# Altium PCB PCB1.PcbDoc
Units mil, origin at the board's own origin, x right, y up, seen from the top; angles counter-clockwise.
Board outline 3936.02 x 2558.06 mil, 2 copper layers (Top Layer, Bottom Layer), stack 61.855 mil thick; 16 components, 2 nets, 52 pads, 0 vias.
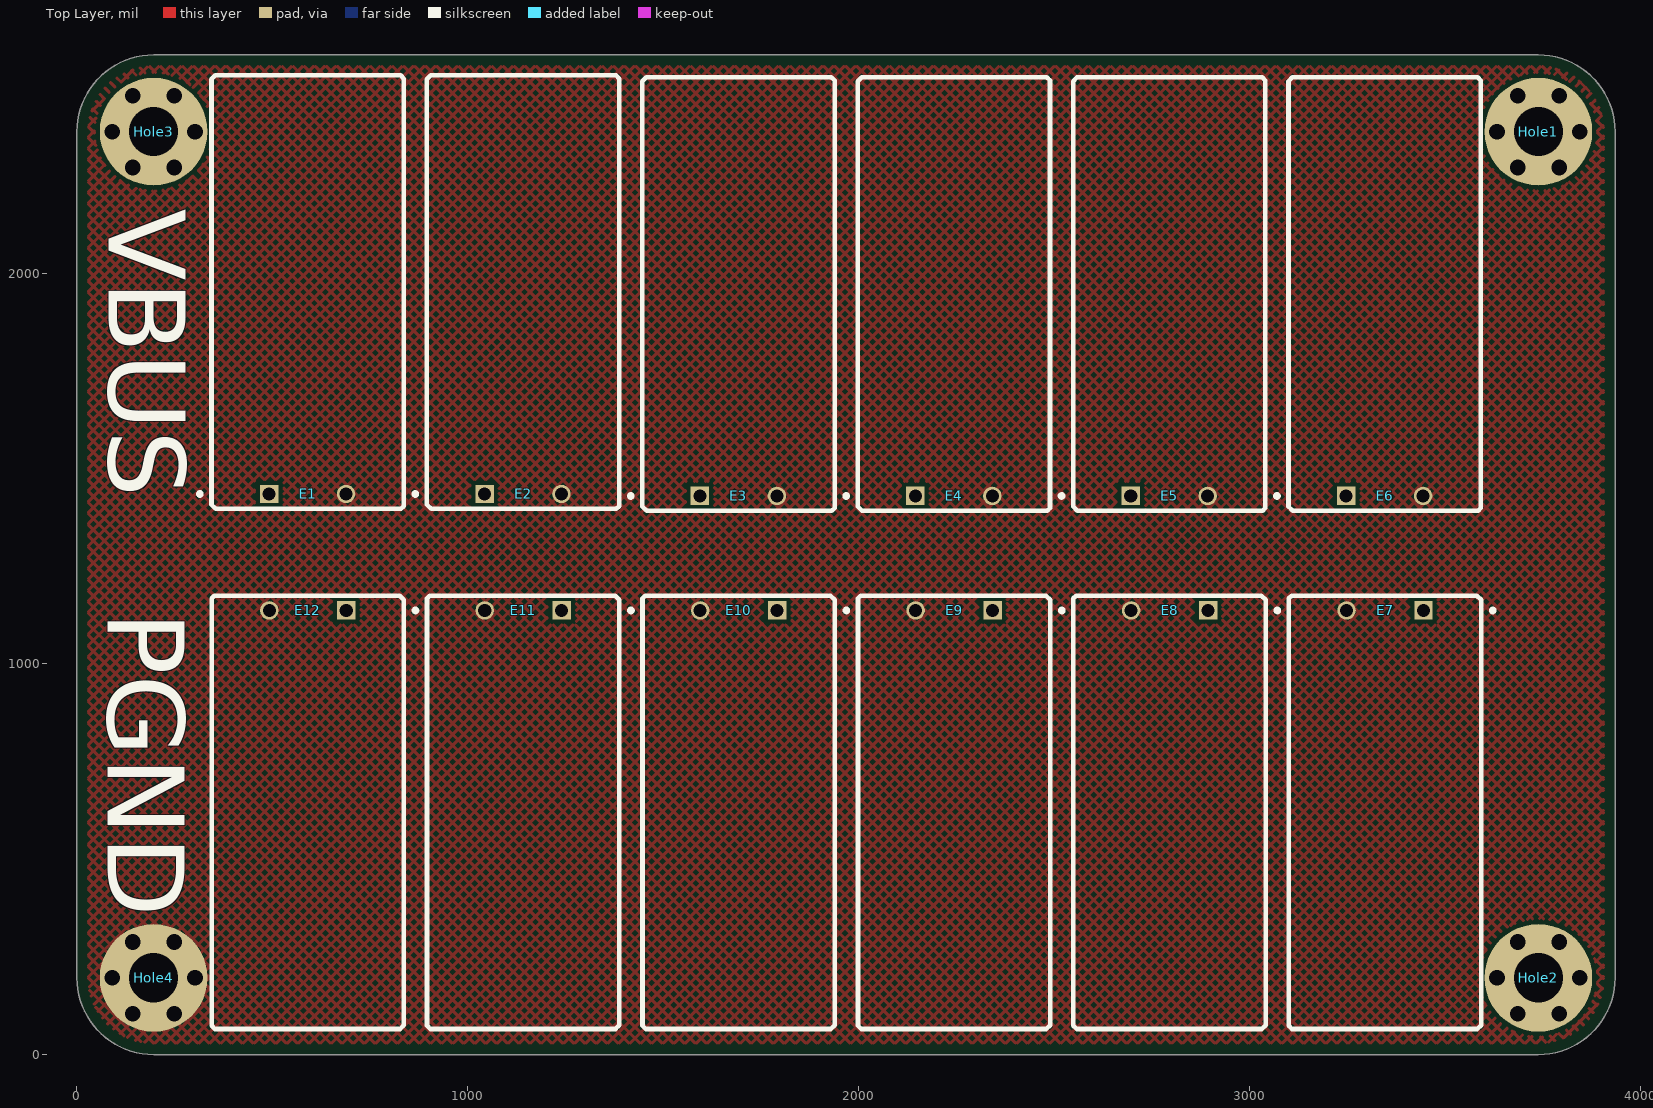
[diagram p0: Top Layer view]
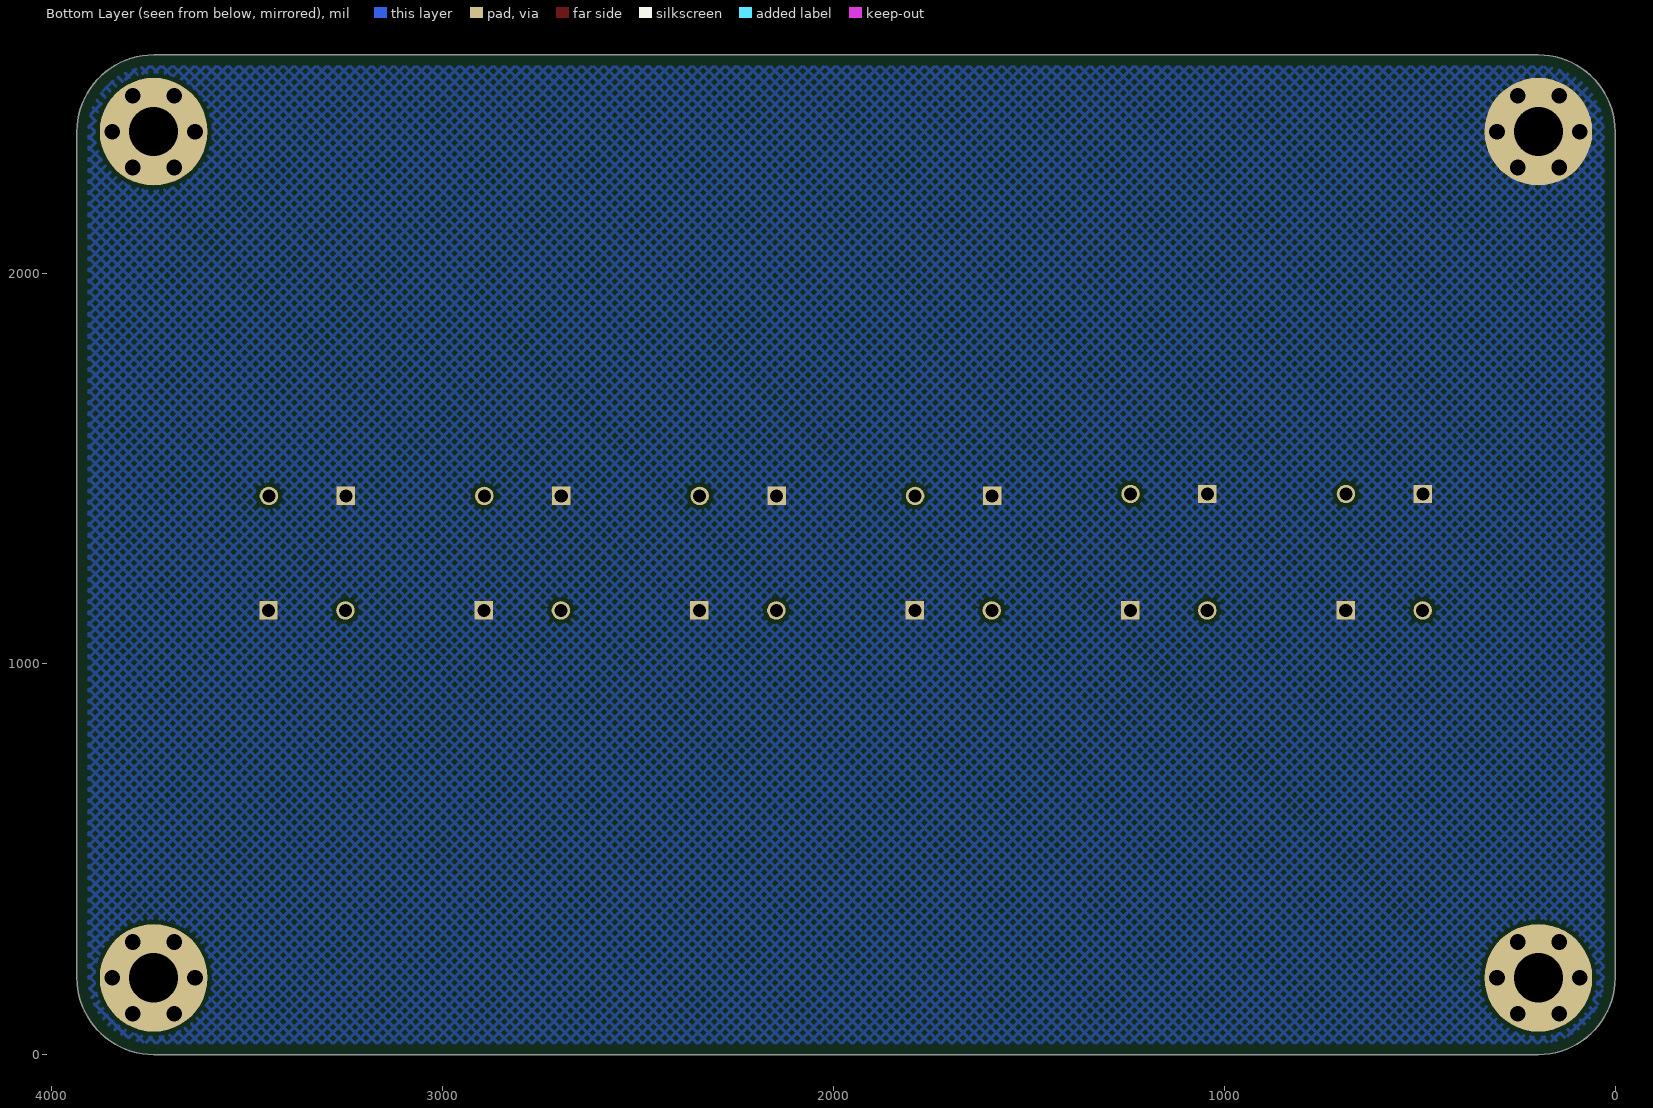
[diagram p1: Bottom Layer view, seen from below]

## Layer stack, top to bottom
Top Solder: solder mask 0.4, Solder Resist, Dk 3.5
Top Layer: signal copper 1.4
Dielectric 1: dielectric 59.0551, FR-4, Dk 4.8
Bottom Layer: signal copper 1.4
Bottom Solder: solder mask 0.4, Solder Resist, Dk 3.5

## Board outline
0.25,196.85 0.25,2362.21 cw(c196.6,2362.21) 196.6,2558.56 3739.91,2558.56 cw(c3739.91,2362.21) 3936.27,2362.21 3936.27,196.85 cw(c3739.91,196.85) 3739.91,0.5 196.6,0.5 cw(c196.6,196.85)

## Design rules (kind name [scope] priority, off if disabled: settings)
BoardOutlineClearance [All] p1: gap=25 ignorepadtopadclearanceinfootprint=FALSE
Clearance [All] p1: gap=10 ignorepadtopadclearanceinfootprint=FALSE except(0: Arc-Hole Track-Hole SMDPad-Hole THPad-Hole Via-Hole Fill-Hole Poly-Hole Region-Hole Text-Hole)
PolygonConnect [All] p1: connectstyle=Direct reliefconductorwidth=10 reliefentries=4 polygonreliefangle="90 Angle" airgapwidth=10
RoutingVias [All] p1: holewidth=28 width=50 viastyle="Through Hole" minholewidth=28 minwidth=50 maxholewidth=28 maxwidth=50
SolderMaskExpansion [All] p1: expansion=4 istentingtop=FALSE
Width [All] p1: maxlimit=10 minlimit=10 preferedwidth=10
30 further rules are at their usual default settings.

## Components (designator, comment, footprint, x,y, rotation, side; value= is the part's Value field where it differs from the comment)
E1 "330uF 100V" "13*25插件电解电容 卧式" 590.57,1435 r0 top
E2 "330uF 100V" "13*25插件电解电容 卧式" 1141.77,1435 r0 top
E3 "330uF 100V" "13*25插件电解电容 卧式" 1692.97,1430 r0 top
E4 "330uF 100V" "13*25插件电解电容 卧式" 2244.17,1430 r0 top
E5 "330uF 100V" "13*25插件电解电容 卧式" 2795.37,1430 r0 top
E6 "330uF 100V" "13*25插件电解电容 卧式" 3346.57,1430 r0 top
E7 "330uF 100V" "13*25插件电解电容 卧式" 3347.57,1137 r180 top
E8 "330uF 100V" "13*25插件电解电容 卧式" 2796.26,1137 r180 top
E9 "330uF 100V" "13*25插件电解电容 卧式" 2244.94,1137 r180 top
E10 "330uF 100V" "13*25插件电解电容 卧式" 1693.63,1137 r180 top
E11 "330uF 100V" "13*25插件电解电容 卧式" 1142.31,1137 r180 top
E12 "330uF 100V" "13*25插件电解电容 卧式" 591,1137 r180 top
Hole1 "M3螺纹孔" M3_3*7载流孔_螺丝 3739.91,2362.21 r0 top
Hole2 "M3螺纹孔" M3_3*7载流孔_螺丝 3739.91,196.85 r0 top
Hole3 "M3螺纹孔" M3_3*7载流孔_螺丝 196.6,2362.21 r0 top
Hole4 "M3螺纹孔" M3_3*7载流孔_螺丝 196.6,196.85 r0 top

## Footprints (in the part's own frame and the unit in brackets; to place one, negate y for a bottom-side part, rotate by r counter-clockwise, add the part's x,y. Pads: shape width x height; smd on the part's side, far side on the other; paste and mask are expansions set on the pad)
"13*25插件电解电容 卧式" [mm]
  rect 1.2x1.2 hole 0.85: 1(-2.5,0)
  round 1.2 hole 0.85: 2(2.5,0)
  silkscreen extent -7.1,-0.97 6.25,27.2, body extent -6.25,-0.29 6.25,27.21, height 12.45
M3_3*7载流孔_螺丝 [mil] "双面焊盘增加接触面积"
  round 40 hole 40: 1(-106,0) 1(-53,-91.8) 1(-53,91.8) 1(53,-91.8) 1(53,91.8) 1(106,0)
  round 275.59 hole 125.98: 1(0,0)
  body extent -137,-138 137,138, height 150

## Part data
E1 E2 E3 E4 E5 E6 E7 E8 E9 E10 E11 E12: library part C-CD, "贴片钽电容", BOM名称=贴片钽电容, 学习资源=www.ooocke.com, 版权归属=源创客

## Nets (pads, with @x,y where several pads share a name; then routed paths per layer and width w, separated by ;. In a path a pad name is that pad's centre, name@x,y a point inside that pad or via, vN(x,y) a via of type N, cw(c..) or ccw(c..) an arc to the next point about the centre after c; other vN are vias at no path point)
PGND: E1.2 E2.2 E3.2 E4.2 E5.2 E6.2 E7.2 E8.2 E9.2 E10.2 E11.2 E12.2 Hole4.1
VBUS: E1.1 E2.1 E3.1 E4.1 E5.1 E6.1 E7.1 E8.1 E9.1 E10.1 E11.1 E12.1 Hole3.1
pads on no net: Hole1.1 Hole2.1

## Polygon pours and split planes (outlines as drawn)
VBUS on Bottom Layer "VBUS_L02_P000" (hatched 45Degree grid 20 track 8, remove dead copper, pour order 0): 0.25,196.85 0.25,2362.21 cw(c196.6,2362.21) 196.6,2558.56 3739.91,2558.56 cw(c3739.91,2362.21) 3936.27,2362.21 3936.27,196.85 cw(c3739.91,196.85) 3739.91,0.5 196.6,0.5 cw(c196.6,196.85)
PGND on Top Layer "PGND_L01_P001" (hatched 45Degree grid 20 track 8, remove dead copper, pour order 1): 0.25,196.85 0.25,2362.21 cw(c196.6,2362.21) 196.6,2558.56 3739.91,2558.56 cw(c3739.91,2362.21) 3936.27,2362.21 3936.27,196.85 cw(c3739.91,196.85) 3739.91,0.5 196.6,0.5 cw(c196.6,196.85)

## Silkscreen, mask and mechanical layers (free items; w line width, h text height)
Top Overlay:
  text "VBUS" at 81.37,2164.63 h196.85 r270
  text "PGND" at 79.37,1134.63 h196.85 r270
Mechanical 1:
  circle w0.5: c3739.91,2362.21 r137.8
  circle w0.5: c3739.91,196.85 r137.8
  circle w0.5: c196.6,196.85 r137.8
  circle w0.5: c196.6,2362.21 r137.8
  lines w0.5: 0.25,196.85 ccw(c196.6,196.85) 196.6,0.5 3739.91,0.5 ccw(c3739.91,196.85) 3936.27,196.85 3936.27,2362.21 ccw(c3739.91,2362.21) 3739.91,2558.56 196.6,2558.56 ccw(c196.6,2362.21) 0.25,2362.21 0.25,196.85